# Altium PCB YoctoBob_LPC1102_r1.0.1.PcbDoc
Units mm, origin at the board's own origin, x right, y up, seen from the top; angles counter-clockwise.
Board outline 19 x 11 mm, 2 copper layers (Top Layer, Bottom Layer); 8 components, 15 nets, 40 pads, 9 vias.
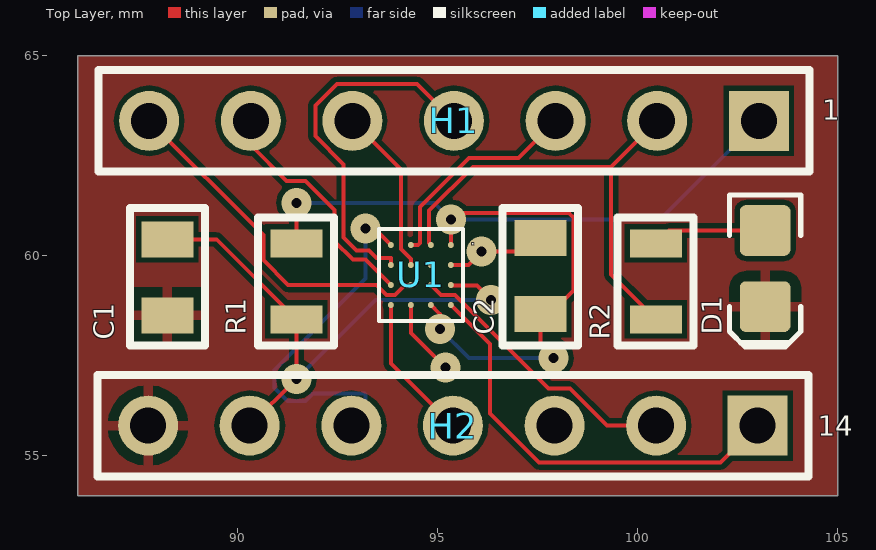
[diagram p0: Top Layer view]
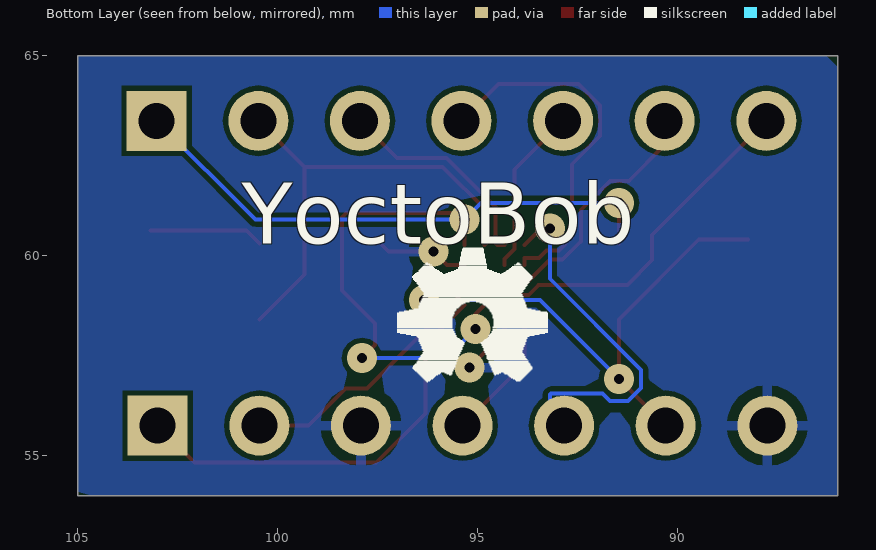
[diagram p1: Bottom Layer view, seen from below]

## Layer stack, top to bottom
Top Solder: solder mask 0.0102, Solder Resist, Dk 3.5
Top Layer: signal copper 0.0356
Dielectric 1: dielectric 0.32, FR-4, Dk 4.8
Bottom Layer: signal copper 0.0356
Bottom Solder: solder mask 0.0102, Solder Resist, Dk 3.5

## Board outline
86,54 105,54 105,65 86,65

## Design rules (kind name [scope] priority, off if disabled: settings)
Clearance [All] p1: gap=0.125
HoleSize [All] p1: absolutevalues=TRUE maxlimit=2.54 minlimit=0.25 maxpercent=80.000 minpercent=20.000
PolygonConnect [All] p1: connectstyle=Relief reliefconductorwidth=0.254 reliefentries=4 polygonreliefangle="90 Angle" airgapwidth=0.254
RoutingVias [All] p1: holewidth=0.25 width=0.75 viastyle="Through Hole" minholewidth=0.25 minwidth=0.75 maxholewidth=0.711 maxwidth=1.27
SolderMaskExpansion [All] p1: expansion=0.102
Width [All] p1: maxlimit=0.254 minlimit=0.1 preferedwidth=0.1
29 further rules are at their usual default settings.

## Components (designator, comment, footprint, x,y, rotation, side; value= is the part's Value field where it differs from the comment)
C1 "100nF" C0805 88.242,59.461 r90 top (schematic designator C3)
C2 "100nF" C0805 97.565,59.487 r270 top (schematic designator C1)
D1 "RED LED" RED_LED_0805 103.186,59.679 r270 top
H1 "7pin_header" HDR1X7 103.026,63.373 r180 top locked
H2 "7pin_header" HDR1X7 103,55.753 r180 top locked
R1 "100K" R0805 91.468,59.36 r90 top
R2 "470R" R0805 100.455,59.36 r90 top (schematic designator R5)
U1 "LPC1102" BGA16x4 95.328,58.769 r180 top

## Footprints (in the part's own frame and the unit in brackets; to place one, negate y for a bottom-side part, rotate by r counter-clockwise, add the part's x,y. Pads: shape width x height; smd on the part's side, far side on the other; paste and mask are expansions set on the pad)
BGA16x4 [mm]
  round 0.15 smd: A1(0,-1.5) A2(0.5,-1.5) A3(1,-1.5) A4(1.5,-1.5) B1(0,-1) B2(0.5,-1) B3(1,-1) B4(1.5,-1) C1(0,-0.5) C2(0.5,-0.5) C3(1,-0.5) C4(1.5,-0.5) D1(0,0) D2(0.5,0) D3(1,0) D4(1.5,0)
  silkscreen extent -0.3,-1.9 1.8,0.4
C0805 [mm]
  rect 0.9x1.3 smd: 1(-0.95,0) 2(0.95,0)
  silkscreen extent -1.7,-0.94 1.73,0.94
HDR1X7 [mm] "Connector; Header; 7 Position"
  rect 1.5x1.5 hole 0.9: 1(0,0)
  round 1.5 hole 0.9: 2(2.54,0) 3(5.08,0) 4(7.62,0) 5(10.16,0) 6(12.7,0) 7(15.24,0)
  silkscreen extent -1.27,-1.27 16.51,1.27
R0805 [mm]
  rect 0.7x1.3 smd: 1(-0.95,0) 2(0.95,0)
  silkscreen extent -1.6,-0.94 1.6,0.97
RED_LED_0805 [mil]
  rrect25% 50x50 smd: 1(-37.5,0) 2(37.5,0)
  silkscreen extent -72,-35 77,35

## Via types
v1: diameter 0.75, hole 0.25, Top Layer to Bottom Layer, tented both sides, 9 vias

## Nets (pads, with @x,y where several pads share a name; then routed paths per layer and width w, separated by ;. In a path a pad name is that pad's centre, name@x,y a point inside that pad or via, vN(x,y) a via of type N, cw(c..) or ccw(c..) an arc to the next point about the centre after c; other vN are vias at no path point)
GND: C1.1 C2.1 D1.2 H2.3 H2.7 U1.B1 U1.D3 | length 4.4
  Top Layer w0.1: U1.D3 94.328,58.072 v1(95.2,57.2) ; U1.B1 95.769,59.769 v1(96.1,60.1) 97.228,60.1 C2.1
NetD1_1: D1.1 R2.2 | length 2.9
  Top Layer w0.1: R2.2 100.777,60.631 D1.1
PIO0_8: H1.2 R2.1 U1.A2 | length 11.8
  Top Layer w0.1: U1.A2 94.784,60.313 94.784,61.13 95.877,62.223 99.336,62.223 ; R2.1 99.336,59.529 99.336,62.223 ; H1.2 99.336,62.223
PIO0_9: H1.3 U1.A3 | length 5.4
  Top Layer w0.1: U1.A3 94.505,60.269 94.559,60.323 94.559,61.223 95.784,62.448 97.021,62.448 H1.3
PIO0_10/SWCLK: H2.5 U1.A4 | length 9.2
  Top Layer w0.1: v1(93.199,60.68) 93.417,60.68 U1.A4
  Bottom Layer w0.1: H2.5 93.199,56.112 93.199,56.525 93.171,56.553 91.878,56.553 91.696,56.371 91.24,56.371 90.918,56.693 90.918,57.149 93.199,59.43 v1(93.199,60.68)
PIO0_11/AD0: H1.4 U1.B4 | length 9.2
  Top Layer w0.1: U1.B4 93.828,59.946 93.469,59.946 93.285,60.13 92.971,60.13 92.649,60.452 92.649,62.282 91.941,62.99 91.941,63.756 92.483,64.298 94.481,64.298 H1.4
PIO1_0/AD1: H1.5 U1.B3 | length 4.2
  Top Layer w0.1: H1.5 94.078,62.161 94.078,60.373 94.078,60.165 94.328,59.915 U1.B3
PIO1_1/AD2: H1.6 U1.C4 | length 6
  Top Layer w0.1: H1.6 90.326,62.771 91.224,61.873 91.696,61.873 92.424,61.145 92.424,60.359 92.878,59.905 93.192,59.905 U1.C4
PIO1_2/AD3: H1.7 U1.C3 | length 8.8
  Top Layer w0.1: H1.7 90.643,60.516 90.643,59.887 91.261,59.269 93.474,59.269 93.724,59.019 93.932,59.019 94.182,59.269 U1.C3
PIO1_3/SDWIO: H2.4 U1.D4 | length 3.7
  Top Layer w0.1: U1.D4 93.828,57.305 H2.4
PIO1_6/RXD: H2.2 U1.C2 | length 7.1
  Top Layer w0.1: U1.C2 95.078,59.019 95.224,59.019 95.432,59.019 97.773,56.678 98.303,56.678 99.228,55.753 H2.2
PIO1_7/TXD: H2.1 U1.D1 | length 10.7
  Top Layer w0.1: U1.D1 96.305,57.792 96.305,56.06 97.537,54.828 102.075,54.828 H2.1
RESET_N: C1.2 H2.6 R1.1 U1.C1 | length 14
  Top Layer w0.1: C1.2 89.466,60.411 R1.1 v1(91.468,56.921) H2.6 ; U1.C1 95.347,59.25 95.981,59.25 v1(96.337,58.894)
  Bottom Layer w0.1: v1(91.468,56.921) 93.441,58.894 v1(96.337,58.894)
VDD: C2.2 H1.1 R1.2 U1.A1 U1.D2 | length 25.4
  Top Layer w0.1: R1.2 v1(91.468,61.323) ; U1.D2 95.051,58.546 v1(95.051,58.167) ; U1.A1 95.328,60.896 v1(95.334,60.902) 95.494,61.062 98.287,61.062 98.39,60.959 98.39,59.125 97.565,58.3 97.565,57.766 v1(97.891,57.44)
  Bottom Layer w0.1: v1(91.468,61.323) 94.913,61.323 v1(95.334,60.902) 100.555,60.902 H1.1 ; v1(95.051,58.167) 95.778,57.44 v1(97.891,57.44)
XTALIN: U1.B2

## Polygon pours and split planes (outlines as drawn)
GND on Top Layer "L6-No Net 1" (solid, pour order 2): 86,65 105,65 105,54 86,54
GND on Bottom Layer "L6-No Net 1" (solid, pour order 4): 86,65 105,65 105,54.1 105,54 86,54

## Silkscreen, mask and mechanical layers (free items; w line width, h text height)
Top Overlay:
  text "1" at 104.615,63.4 h0.5
  text "." at 95.825,60.275 h0.25
  text "14" at 104.5,55.5 h0.5
Bottom Overlay:
  drawing of 240 lines, arcs and shapes, not listed
  text "YoctoBob" at 100.9,60.3 h1.52
Mechanical 2:
  lines w0.102: 105,65 86,65 86,54 105,54 105,65 ; 105,65 105,65